# Altium PCB RX.PcbDoc (part 2 of 2)
Units mm, origin at the board's own origin, x right, y up, seen from the top; angles counter-clockwise.
Board outline 47 x 37 mm, 4 copper layers (Top Layer, Top Inner Layer, Bottom Inner Layer, Bottom Layer), stack 1.569 mm thick; 85 components, 65 nets, 311 pads, 196 vias.
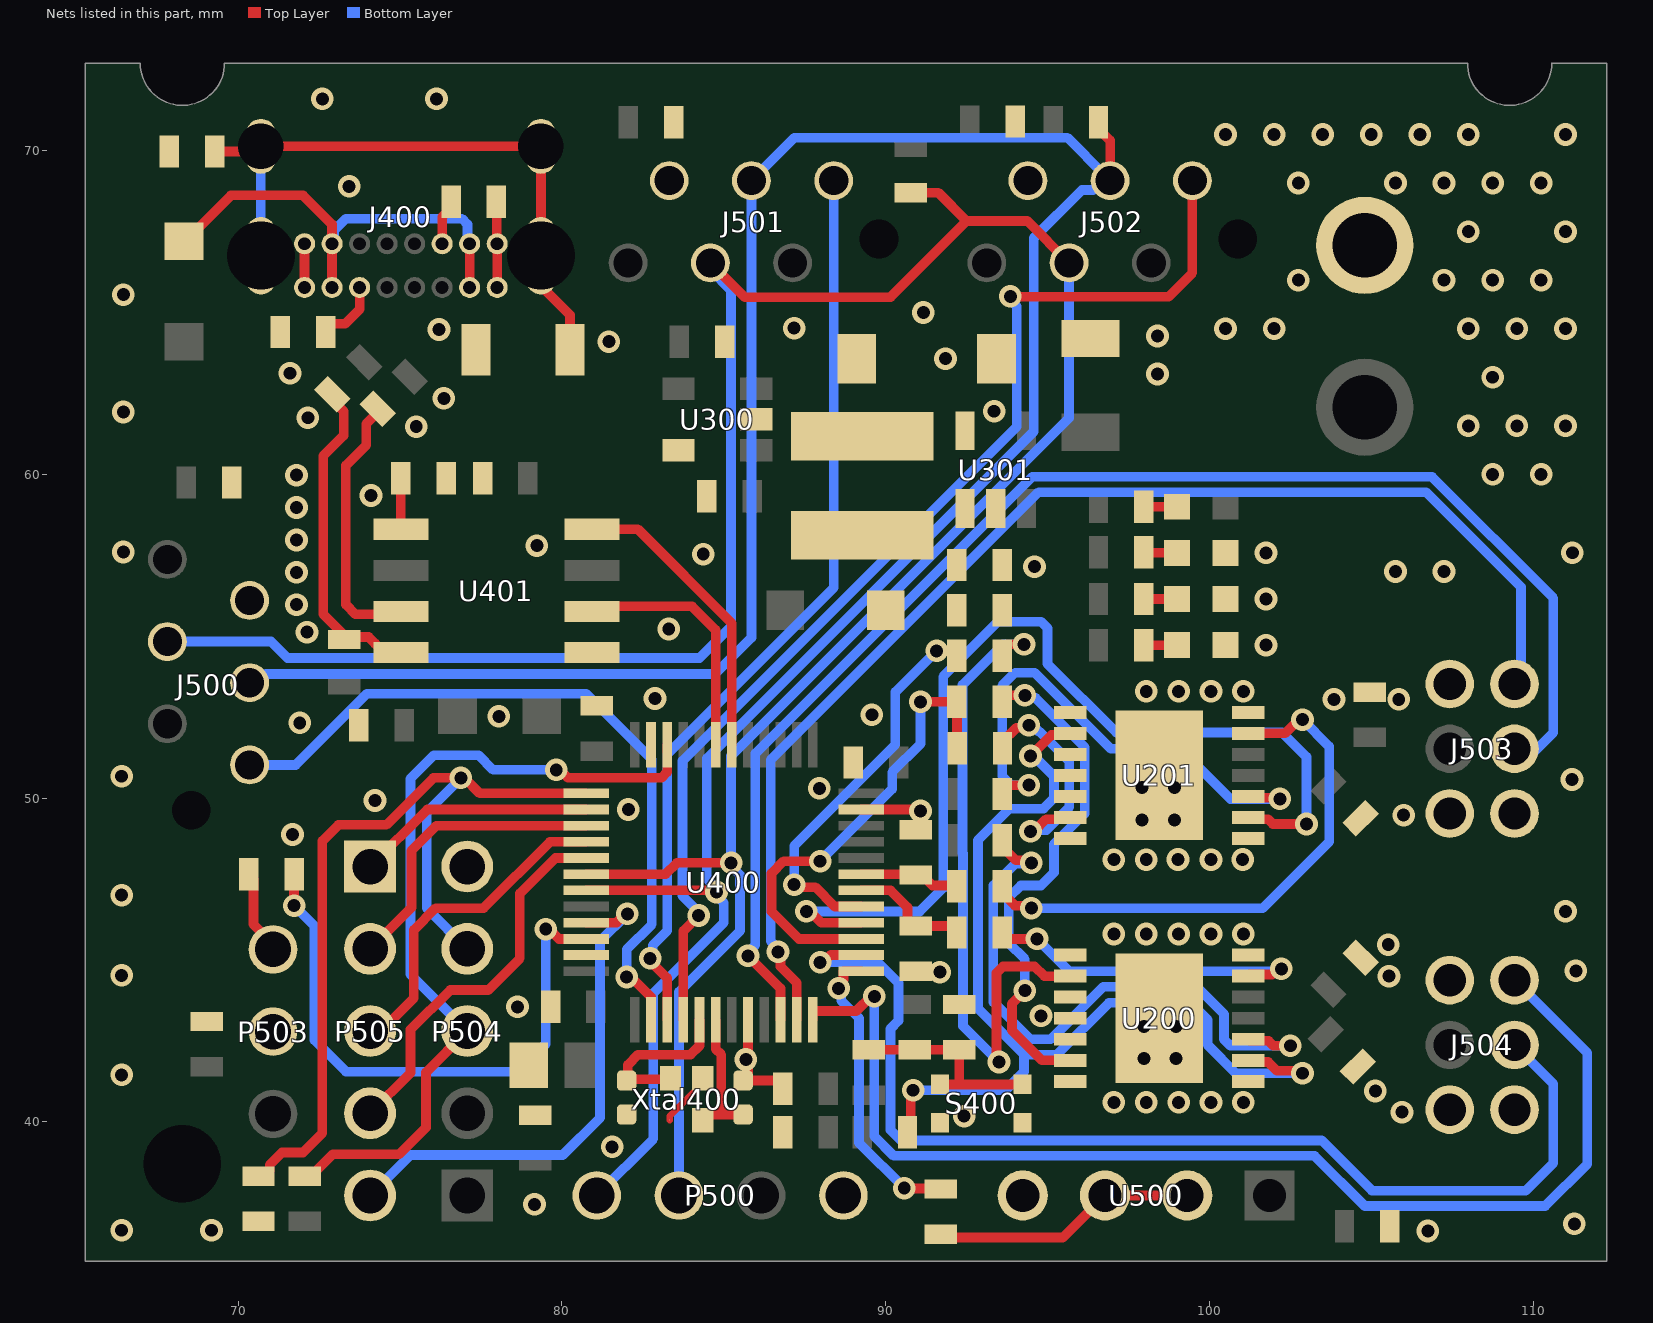
[diagram p4: the nets of this part, all layers, seen from the top]

## Via types
v1: diameter 0.7, hole 0.4, Top Layer to Bottom Layer, 196 vias

## Nets (pads, with @x,y where several pads share a name; then routed paths per layer and width w, separated by ;. In a path a pad name is that pad's centre, name@x,y a point inside that pad or via, vN(x,y) a via of type N, cw(c..) or ccw(c..) an arc to the next point about the centre after c; other vN are vias at no path point) (continued)
GND: C200.1 C201.1 C202.1 C203.1 C204.2 C205.2 C300.1 C301.1 C303.1 C304.1 C305.1 C400.1 C401.2 C402.2 C403.1 C404.2 C405.1 C406.1 C407.1 C408.2 C409.2 C410.1 C411.2 C500.2 C501.2 C502.2 C503.2 C504.2 C505.2 D302.2 D304.1 D305.1 D306.1 J300.2 J400.A1 J400.A12 J400.B1 J400.B12 J500.2 J501.2 J502.2 J503.1 J504.1 P500.1 P503.2 P504.5 R402.2 R403.1 R407.2 R501.1 R503.1 S400.1 S400.2 U200.3 U200.4 U200.5 U200.15 U201.3 U201.4 U201.5 U201.15 U300.2 U300.5 U301.2 U400.8 U400.23 U400.35 U400.47 U401.1 U500.4 Xtal400.2 Xtal400.4 | length 11.5
  Top Layer w0.2: Xtal400.2@83.325,40.05 83.325,40.175 84.125,40.975 84.125,41.125 Xtal400.4@84.35,41.35
  Top Layer w0.3: J400.A1@72.05,65.775 J400.B12@72.05,67.125 ; R403.1@77.975,68.425 77.988,68.413 77.988,67.138 J400.B1@78,67.125 J400.A12@78,65.775 ; U400.8@85.75,43.15 85.75,41.425 C406.1@85.6,41.275 86.675,41.275 86.825,41.125 C402.2@86.825,41.025 ; U400.23@89.25,49.65 91.025,49.65 v1(91.075,49.6) 91.075,49.175 C205.2@90.925,49.025
  other v1: 106.75,36.625 66.4,36.65 69.175,36.65 111.275,36.85 79.15,37.45 81.55,39.225 92.425,40.175 105.95,40.3 105.125,40.95 66.4,41.45 85.679,41.927 97.975,41.95 98.975,41.95 97.975,42.95 98.975,42.95 94.8,43.275 78.625,43.55 105.55,44.5 66.4,44.525 91.675,44.625 111.323,44.662 105.525,45.475 111,46.5 66.4,47 71.675,48.875 97.925,49.325 98.925,49.325 106,49.475 82.05,49.65 74.225,49.925 87.95,50.3 97.925,50.325 98.925,50.325 111.2,50.575 66.4,50.675 71.9,52.325 78.05,52.525 89.575,52.575 103.85,53.05 105.85,53.05 82.875,53.075 101.75,54.725 72.125,55.125 83.3,55.225 71.8,55.975 101.75,56.15 71.8,56.975 105.75,57 107.25,57 94.6,57.15 84.365,57.537 101.75,57.575 111.212,57.58 66.45,57.6 79.225,57.8 71.8,57.975 71.8,58.975 74.1,59.35 71.8,59.975 108.75,60 110.25,60 75.5,61.475 108,61.5 109.5,61.5 111,61.5 72.15,61.75 66.45,61.925 93.35,61.95 76.35,62.35 108.75,63 98.4,63.1 71.6,63.125 91.85,63.575 81.45,64.1 98.4,64.275 76.2,64.475 100.5,64.5 102,64.5 108,64.5 109.5,64.5 111,64.5 87.173,64.516 91.165,65 66.45,65.55 102.75,66 107.25,66 108.75,66 110.25,66 108,67.5 111,67.5 73.425,68.9 102.75,69 105.75,69 107.25,69 108.75,69 110.25,69 100.5,70.5 102,70.5 103.5,70.5 105,70.5 106.5,70.5 108,70.5 111,70.5 72.6,71.6 76.125,71.6
HE1_A: J504.5 U400.14 | length 34.5
  Top Layer w0.3: v1(87.975,44.925) 88.075,44.925 88.3,45.15 U400.14@89.25,45.15
  Bottom Layer w0.3: v1(87.975,44.925) 89.766,44.925 90.4,44.291 90.4,43.125 90.15,42.875 90.15,39.75 90.475,39.425 103.475,39.425 105.025,37.875 109.775,37.875 110.625,38.725 110.625,41.175 J504.5@109.425,42.375
HE1_B: J504.6 U400.12 | length 36.7
  Top Layer w0.3: U400.12@87.75,43.15 87.75,43.425 89.092,43.425 89.542,43.875 v1(89.65,43.875)
  Bottom Layer w0.3: v1(89.65,43.875) 89.65,39.55 90.25,38.95 103.25,38.95 104.8,37.4 110.375,37.4 111.675,38.7 111.675,42.125 J504.6@109.425,44.375
HE2_A: J503.6 U400.11 | length 39.7
  Top Layer w0.3: v1(86.675,45.25) 86.752,45.173 86.752,44.798 87.25,44.3 U400.11@87.25,43.15
  Bottom Layer w0.3: v1(86.675,45.25) 86.675,45.358 86.45,45.583 86.45,51.175 94.725,59.45 106.694,59.45 109.625,56.519 J503.6@109.625,53.025
HE2_B: J503.5 U400.10 | length 44
  Top Layer w0.3: v1(85.75,45.125) 86.75,44.125 U400.10@86.75,43.15
  Bottom Layer w0.3: v1(85.75,45.125) 85.75,45.233 85.975,45.458 85.975,51.375 94.525,59.925 106.877,59.925 110.625,56.177 110.625,52.025 J503.5@109.625,51.025
IS1: C204.1 R206.1 U400.18 | length 3.8
  Top Layer w0.3: U400.18@89.25,47.15 90.15,47.15 90.676,46.624 90.676,46.2 90.826,46.05 92.05,46.05 92.2,45.9 R206.1@92.2,45.85
IS2: C205.1 R207.1 U400.19 | length 3.1
  Top Layer w0.3: U400.19@89.25,47.65 90.9,47.65 C205.1@90.925,47.625 91.125,47.625 91.45,47.3 92.175,47.3 R207.1@92.2,47.275
M1_N: J504.4 U200.7 U200.8
  other v1: 97.05,40.6 98.05,40.6 99.05,40.6 100.05,40.6 101.05,40.6
M1_P: J504.3 U200.1 U200.14
  other v1: 97.05,45.8 98.05,45.8 99.05,45.8 100.05,45.8 101.05,45.8
M2_N: J503.4 U201.7 U201.8
  other v1: 97.05,48.1 98.05,48.1 99.03,48.102 100.05,48.1 101.03,48.102
M2_P: J503.3 U201.1 U201.14
  other v1: 98.05,53.3 99.05,53.3 100.05,53.3 101.05,53.3
MCU_RX: U400.31 U401.2 | length 7.7
  Top Layer w0.3: U401.2@80.925,55.765 81.085,55.925 84.025,55.925 84.75,55.2 U400.31@84.75,51.65
MCU_TX: U400.30 U401.4 | length 9.3
  Top Layer w0.3: U401.4@80.925,58.305 82.345,58.305 85.25,55.4 U400.30@85.25,51.65
NetC303_2: C303.2 C304.2 D300.2 L301.2 U301.1
NetC400_2: C400.2 R400.1 R401.1 S400.3 S400.4 | length 6.5
  Top Layer w0.3: R400.1@89.475,42.225 R401.1@90.9,42.225 92.061,42.225 C400.2@92.275,42.225 92.275,41.15 91.675,41.15 S400.4@91.675,41.165 ; 92.211,41.15 94.21,41.15 S400.3@94.225,41.165
NetC405_2: C405.2 U400.5 Xtal400.1 | length 5.1
  Top Layer w0.3: Xtal400.1@83.35,41.35 83.313,41.313 82.038,41.313 C405.2@82,41.275 82.034,41.309 82.034,41.759 82.35,42.075 83.975,42.075 84.25,42.35 U400.5@84.25,43.15
NetC406_2: C406.2 U400.6 Xtal400.3 | length 4.3
  Top Layer w0.3: Xtal400.3@84.35,40.05 84.525,40.225 84.925,40.225 ; U400.6@84.75,43.15 84.75,42.25 84.925,42.075 84.925,40.225 ; C406.2@85.6,40.225 84.925,40.225
NetC407_2: C407.2 J400.1 J400.2 J400.3 J400.4 R407.1 | length 20.2
  Top Layer w0.3: C407.2@69.275,69.975 70.423,69.975 J400.3@70.7,69.698 ; J400.3@70.7,70.135 J400.4@79.35,70.135 J400.2@79.35,66.755 79.465,66.64 79.465,65.71 80.25,64.925 R407.1@80.25,63.85
  Bottom Layer w0.3: J400.1@70.7,66.755 J400.3@70.7,70.135
NetC408_1: C408.1 U401.5 | length 1.6
  Top Layer w0.3: U401.5@75.025,58.305 C408.1@75.025,59.875
NetD302_1: D302.1 L301.1 U301.5
NetD303_2: D303.2 R303.2 | length 1
  Top Layer w0.3: R303.2@97.975,59 D303.2@99,59
NetD304_2: D304.2 R300.1 | length 1
  Top Layer w0.3: R300.1@97.975,57.6 98,57.575 D304.2@99,57.575
NetD305_2: D305.2 R301.2 | length 1
  Top Layer w0.3: R301.2@97.975,54.725 D305.2@99,54.725
NetD306_2: D306.2 R302.1 | length 1
  Top Layer w0.3: R302.1@97.975,56.15 D306.2@99,56.15
NetJ400_A5: J400.A5 R402.1 | length 2.1
  Top Layer w0.3: R402.1@72.7,64.4 72.7,64.5 72.85,64.65 73.3,64.65 73.75,65.1 J400.A5@73.75,65.775
NetJ400_B5: J400.B5 R403.2 | length 1.4
  Top Layer w0.3: J400.B5@76.3,67.125 76.3,67.95 76.575,68.225 R403.2@76.575,68.425
NetP503_3: P503.3 R504.1 | length 2.6
  Top Layer w0.3: R504.1@70.325,47.65 70.475,47.5 70.475,46.101 71.075,45.501 P503.3@71.075,45.325
NetR200_1: R200.1 U200.9 U201.2 | length 31.3
  Top Layer w0.3: R200.1@90.675,39.675 90.775,39.775 90.775,40.9 v1(90.85,40.975) ; v1(94.475,51.3) 95.125,51.95 95.575,51.95 U201.2@95.662,52.038 ; U200.9@101.2,41.9 101.25,41.85 101.817,41.85 102.09,41.577 102.798,41.577 v1(102.875,41.5)
  Bottom Layer w0.3: v1(90.85,40.975) 93.7,40.975 94.275,41.55 94.275,42.075 ; v1(94.475,51.3) 94.575,51.3 95.2,50.675 95.2,50 94.875,49.675 93.825,49.675 92.85,48.7 92.85,43.5 94.275,42.075 ; v1(102.875,41.5) 100.825,41.5 99.95,42.375 99.95,43.15 99.425,43.675 96.9,43.675 95.3,42.075 94.275,42.075
NetR201_2: R201.2 U200.2 | length 20.7
  Top Layer w0.3: v1(93.5,41.85) 93.424,41.926 93.424,44.599 93.625,44.8 94.6,44.8 94.9,44.5 U200.2@95.7,44.5 ; R201.2@93.6,54.4 93.6,54.6 93.75,54.75 v1(94.275,54.75)
  Bottom Layer w0.3: v1(93.5,41.85) 92.39,42.96 92.39,48.289 92.375,48.304 92.375,53.5 93.625,54.75 v1(94.275,54.75)
NetR202_2: R202.2 U200.10 | length 19.3
  Top Layer w0.3: R202.2@93.6,48.7 93.6,48.5 94.023,48.077 94.423,48.077 v1(94.5,48) ; U200.10@101.2,42.55 101.25,42.5 101.825,42.5 101.972,42.353 102.497,42.353 v1(102.5,42.35)
  Bottom Layer w0.3: v1(94.5,48) 94.472,47.972 93.997,47.972 93.325,47.3 93.325,43.7 94.475,42.55 95.1,42.55 96.725,44.175 99.6,44.175 100.45,43.325 100.45,42.55 100.65,42.35 v1(102.5,42.35)
NetR203_2: R203.2 U201.10 | length 16.1
  Top Layer w0.3: R203.2@93.6,50.125 93.6,50.25 93.75,50.4 v1(94.425,50.4) ; U201.10@101.2,50.05 101.238,50.013 102.137,50.013 v1(102.175,49.975)
  Bottom Layer w0.3: v1(94.425,50.4) 93.875,50.4 93.6,50.675 93.6,53.475 94,53.875 94.6,53.875 96.95,51.525 99.1,51.525 100.65,49.975 v1(102.175,49.975)
NetR204_2: R204.2 U200.6 | length 16
  Top Layer w0.3: R204.2@93.6,52.975 93.75,53.125 93.75,53.175 v1(94.3,53.175) ; v1(94.3,44.05) 93.9,43.65 93.9,42.826 94.826,41.9 U200.6@95.7,41.9
  Bottom Layer w0.3: v1(94.3,44.05) 94.3,45.025 93.8,45.525 93.8,46.925 94.175,47.3 94.8,47.3 95.2,47.7 95.2,48.575 96.15,49.525 96.15,51.575 94.627,53.098 94.377,53.098 v1(94.3,53.175)
NetR205_2: R205.2 U201.6 | length 7.3
  Top Layer w0.3: R205.2@93.608,51.544 93.608,51.744 94.038,52.173 94.348,52.173 v1(94.425,52.25) ; v1(94.475,48.975) 94.583,48.975 94.958,49.35 95.65,49.35 U201.6@95.7,49.4
  Bottom Layer w0.3: v1(94.425,52.25) 94.533,52.25 94.733,52.05 94.75,52.05 95.675,51.125 95.675,49.721 94.968,49.014 94.514,49.014 v1(94.475,48.975)
NetR206_2: R206.2 U200.13 | length 10.3
  Top Layer w0.3: R206.2@93.6,45.85 93.6,45.8 93.75,45.65 v1(94.675,45.65) ; U200.13@101.2,44.5 101.25,44.55 101.942,44.55 102.117,44.725 v1(102.225,44.725)
  Bottom Layer w0.3: v1(94.675,45.65) 95.675,44.65 102.15,44.65 v1(102.225,44.725)
NetR207_2: R207.2 U201.13 | length 17.3
  Top Layer w0.3: R207.2@93.488,47.187 93.998,46.677 94.423,46.677 v1(94.5,46.6) ; U201.13@101.2,52 102.342,52 102.767,52.425 v1(102.875,52.425)
  Bottom Layer w0.3: v1(94.5,46.6) 101.65,46.6 103.7,48.65 103.7,51.6 v1(102.875,52.425)
NetR500_2: R500.2 U500.2 U500.3 | length 8.2
  Top Layer w0.3: R500.2@91.7,36.525 91.8,36.425 95.475,36.425 U500.3@96.775,37.725 U500.2@99.315,37.725
PA15: P505.1 U400.38 | length 7.4
  Top Layer w0.3: P505.1@74.075,47.885 75.84,49.65 U400.38@80.75,49.65
PB3: P505.2 U400.39 | length 9.3
  Top Layer w0.3: P505.2@74.075,45.345 75.35,46.62 75.35,48.377 76.123,49.15 U400.39@80.75,49.15
PB4: P505.3 U400.40 | length 10.3
  Top Layer w0.3: P505.3@74.075,42.805 74.405,42.805 75.425,43.825 75.425,45.925 76.1,46.6 77.575,46.6 79.625,48.65 U400.40@80.75,48.65
PB5: P505.4 U400.41 | length 11.9
  Top Layer w0.3: P505.4@74.075,40.265 75.325,41.515 75.325,42.85 76.55,44.075 77.725,44.075 78.7,45.05 78.7,47.05 79.8,48.15 U400.41@80.75,48.15
PB8: P505.5 U400.45 | length 16.1
  Top Layer w0.3: U400.45@80.75,46.15 81.692,46.15 81.967,46.425 v1(82.021,46.425)
  Bottom Layer w0.3: P505.5@74.075,37.725 75.325,38.975 80.025,38.975 81.175,40.125 81.175,45.579 v1(82.021,46.425)
RF_DATA: R500.1 U400.13 | length 9.3
  Top Layer w0.3: v1(88.55,44.125) 88.55,44.233 88.7,44.383 88.7,44.65 U400.13@89.25,44.65 ; v1(90.575,37.95) 90.587,37.938 91.688,37.938 R500.1@91.7,37.925
  Bottom Layer w0.3: v1(88.55,44.125) 88.627,44.048 88.627,43.748 89.175,43.2 89.175,39.35 v1(90.575,37.95)
SCK: R204.1 R205.1 U400.15 | length 14.7
  Top Layer w0.3: v1(87.975,48.05) 86.85,48.05 86.475,47.675 86.475,46.5 87.325,45.65 U400.15@89.25,45.65 ; v1(91.075,52.975) R204.1@92.2,52.975 92.204,52.971 92.204,51.548 R205.1@92.208,51.544
  Bottom Layer w0.3: v1@87.978,48.053 90.2,50.275 90.2,50.8 91.075,51.675 v1(91.075,52.975)
SCL: J500.3 J501.3 J502.3 P500.3 R410.1 U400.42 | length 83.3
  Top Layer w0.3: U400.42@80.75,47.65 83.2,47.65 83.55,48 v1(85.225,48) ; J501.3@84.585,66.535 85.645,65.475 90.15,65.475 92.5,67.825 ; R410.1@90.775,68.7 91.625,68.7 92.5,67.825 ; J502.3@95.665,66.535 94.375,67.825 92.5,67.825
  Bottom Layer w0.3: J500.3@67.81,54.835 71.015,54.835 71.525,54.325 84.25,54.325 85.223,55.298 85.223,65.688 84.585,66.325 J501.3@84.585,66.535 ; P500.3@83.615,37.725 83.615,44.015 85.5,45.9 85.5,47.624 85.225,47.899 85.225,51.3 95.665,61.74 J502.3@95.665,66.535
SDA: J500.4 J501.4 J502.4 P500.4 R409.1 U400.43 | length 86.7
  Top Layer w0.3: U400.43@80.75,47.15 84.725,47.15 v1(84.775,47.1) ; R409.1@96.575,70.875 96.575,70.675 96.935,70.315 J502.4@96.935,69.075
  Bottom Layer w0.3: J500.4@70.35,53.565 70.594,53.565 70.86,53.831 84.731,53.831 85.855,54.955 J501.4@85.855,69.075 87.18,70.4 95.61,70.4 96.78,69.23 96.78,69.164 96.404,68.788 96.063,68.788 94.575,67.3 94.575,61.325 84.475,51.225 84.475,47.508 v1@84.775,47.208 ; P500.4@81.075,37.725 82.825,39.475 82.825,43.975 85,46.15 85,46.767 84.775,46.992 v1(84.775,47.1)
SDI: R201.1 U400.17 | length 12.1
  Top Layer w0.3: v1(87.175,47.325) 87.252,47.248 87.827,47.248 88.425,46.65 U400.17@89.25,46.65 ; v1(91.575,54.55) 92.05,54.55 R201.1@92.2,54.4
  Bottom Layer w0.3: v1(87.175,47.325) 87.175,48.525 90.3,51.65 90.3,53.275 v1(91.575,54.55)
SDO: U201.9 U400.16 | length 31.2
  Top Layer w0.3: v1(87.55,46.5) 87.658,46.5 88.008,46.15 U400.16@89.25,46.15 ; U201.9@101.2,49.4 101.25,49.35 101.81,49.35 101.96,49.2 v1(103,49.2)
  Bottom Layer w0.3: v1(87.55,46.5) 91.05,46.5 91.775,47.225 91.775,53.75 93.475,55.45 94.8,55.45 95,55.25 95,54.15 97.125,52.025 102.25,52.025 103,51.275 v1(103,49.2)
SERVO: R504.2 U400.46 | length 18.2
  Top Layer w0.3: v1@71.725,46.65 R504.2@71.725,47.65 ; v1(79.5,45.95) 79.608,45.95 79.908,45.65 U400.46@80.75,45.65
  Bottom Layer w0.3: v1(71.729,46.677) 72.35,46.056 72.35,42.525 73.325,41.55 78.65,41.55 79.5,42.4 v1(79.5,45.95)
SWCLK: P504.4 R503.2 U400.37 | length 27.1
  Top Layer w0.3: R503.2@70.625,38.325 70.825,38.325 70.975,38.475 70.975,38.675 71.35,39.05 72,39.05 72.6,39.65 72.6,48.675 73.1,49.175 74.575,49.175 76.025,50.625 v1(76.875,50.625) 76.983,50.625 77.458,50.15 U400.37@80.75,50.15
  Bottom Layer w0.3: v1(76.875,50.625) 75.825,49.575 75.825,46.595 P504.4@77.075,45.345
SWDIO: P504.3 R502.2 U400.34 | length 25.8
  Top Layer w0.3: R502.2@72.05,38.325 72.25,38.325 72.925,39 74.975,39 75.8,39.825 75.8,41.53 P504.3@77.075,42.805 ; v1(79.825,50.875) 79.933,50.875 80.183,50.625 83.074,50.625 83.25,50.801 U400.34@83.25,51.65
  Bottom Layer w0.3: P504.3@77.075,42.805 75.325,44.555 75.325,50.6 76.05,51.325 77.425,51.325 77.875,50.875 v1(79.825,50.875)
TOF_1: J500.6 U400.2 | length 22.9
  Top Layer w0.3: v1(82,44.475) 82.077,44.398 82.205,44.398 82.75,43.854 U400.2@82.75,43.15
  Bottom Layer w0.3: J500.6@70.35,51.025 71.775,51.025 73.975,53.225 80.75,53.225 82.775,51.2 82.775,46.1 82,45.325 v1(82,44.475)
TOF_2: J501.6 U400.3 | length 28.5
  Top Layer w0.3: v1(82.725,45.05) 82.725,44.969 83.25,44.444 U400.3@83.25,43.15
  Bottom Layer w0.3: v1(82.725,45.05) 82.802,45.127 82.802,45.452 83.25,45.9 83.25,51.35 88.395,56.495 J501.6@88.395,69.075
TOF_3: J502.6 U400.4 | length 35.9
  Top Layer w0.3: U400.4@83.75,43.15 83.75,45.9 v1(84.225,46.375) ; v1(93.85,65.5) 93.865,65.485 98.735,65.485 99.475,66.225 J502.6@99.475,69.075
  Bottom Layer w0.3: v1(84.225,46.375) 84.225,46.483 83.725,46.983 83.725,51.15 94.05,61.475 94.05,65.192 93.85,65.392 v1(93.85,65.5)
USB_D_N: R406.2 U401.7 | length 8.3
  Top Layer w0.3: R406.2@74.305,62.03 74.305,61.917 73.956,61.567 73.956,60.909 73.325,60.278 73.325,55.975 73.625,55.675 74.935,55.675 U401.7@75.025,55.765
USB_D_P: R404.1 R405.2 U401.8 | length 10.1
  Top Layer w0.3: R405.2@72.905,62.48 72.905,62.301 73.256,61.951 73.256,61.199 72.625,60.568 72.625,55.685 73.13,55.18 73.335,54.975 74.03,54.975 74.225,54.78 74.225,54.77 74.5,54.495 U401.8@75.025,54.495
VBUS: D400.2 J400.A4 J400.A9 J400.B4 J400.B9 | length 14.2
  Top Layer w0.3: D400.2@68.325,67.2 68.36,67.2 69.78,68.62 72.005,68.62 72.9,67.725 J400.B9@72.9,67.125 J400.A4@72.9,65.775 ; J400.A9@77.15,65.775 J400.B4@77.15,67.125
  Bottom Layer w0.3: J400.B9@72.9,67.125 72.967,67.192 72.967,67.542 73.325,67.9 76.907,67.9 77.083,67.724 77.083,67.192 J400.B4@77.15,67.125
pads on no net: J400.A8 J400.B8 J500.0 J500.5 J501.0 J501.5 J502.0 J502.5 U400.20 U400.22 U400.26 U400.27 U400.28 U400.29 U400.32 U400.33

## Polygon pours and split planes (outlines as drawn)
GND on Top Layer "GND_L01_P071" (solid, remove dead copper, pour order 71): 63.825,76.85 115.225,76.85 115.225,35.175 63.825,35.175
GND on Top Layer "Main" (solid, remove dead copper, pour order 42): 85.425,58.538 85.425,61.275 86.55,61.275 86.55,62.175 85.675,62.175 85.675,65.1 82.75,65.1 82.75,58.538
GND on Top Layer "Main" (solid, remove dead copper, pour order 77): 83.975,54.396 85.5,54.396 85.5,58.975 84.45,58.975 84.45,57.175 83.975,56.7
+3V3 on Top Layer "Main" (solid, remove dead copper, pour order 61): 76.175,56.95 80.25,56.95 81.8,58.5 84.325,58.5 84.325,57.275 83.825,56.775 83.825,54.65 83.175,54.65 82.425,55.4 76.175,55.4
+5V on Top Layer "Main" (solid, remove dead copper, pour order 38): 86.975,57.075 88.1,57.075 88.1,55.1 87.6,55.1 86.225,55.1 86.225,56.45 85.5,57.175 85.5,61.175 86.55,61.175 86.55,57.5
NetC303_2 on Top Layer "Main" (solid, remove dead copper, pour order 39): 88.237,57.375 89.425,56.187 89.425,55.175 92.375,55.175 92.75,55.55 92.75,59.55 91.8,59.55 91.125,58.875 87.075,58.875 87.075,57.375
+12V on Top Layer "Main" (solid, remove dead copper, pour order 54): 105.2,43.8 106.375,43.8 106.725,43.45 107.9,43.45 108.375,42.975 108.375,41.825 107.975,41.425 105.85,41.425 104.725,42.55 104.25,42.075 103.275,42.075 102.4,42.95 100.575,42.95 100.575,44.1 102.325,44.1 103.353,45.128 103.872,45.128
GND on Top Layer "Main" (solid, remove dead copper, pour order 62): 94.725,42.325 94.125,42.925 94.125,43.75 94.475,44.1 96.4,44.1 96.4,44.675 96.95,45.225 99.8,45.225 99.8,41.125 97.025,41.125 97.025,41.675 96.375,42.325
GND on Top Layer "Main" (solid, remove dead copper, pour order 83): 81.5,45.406 79.057,45.406 79.057,45.006 78.025,43.974 78.025,39.82 78.545,39.3 80.15,39.3 80.15,44.8 81.5,44.8
GND on Top Layer "Main" (solid, remove dead copper, pour order 78): 92.954,60.425 92.954,55.471 93.3,55.125 93.991,55.125 94.166,55.3 94.154,55.312 94.154,58.021 93.846,58.329 93.846,60.425
GND on Top Layer "Main" (solid, remove dead copper, pour order 76): 90.4,44.325 91.325,44.325 91.725,43.925 91.725,43.275 92.875,43.275 92.875,44.4 92.25,45.025 90.4,45.025
GND on Top Layer "Main" (solid, remove dead copper, pour order 75): 95.175,51.625 95.175,49.8 96.45,49.8 97.025,49.225 97.025,48.675 99.875,48.675 99.875,52.75 96.959,52.75 96.475,52.266 96.475,51.625
NetD302_1 on Top Layer "Main" (solid, remove dead copper, pour order 40): 91.15,61.95 89.725,63.375 89.725,64.35 88.5,64.35 88.5,63.35 87.075,61.925 87.075,60.425 92.75,60.425 92.75,61.95
+12V on Top Layer "Main" (solid, remove dead copper, pour order 41): 94.85,58.975 95.65,59.775 105.725,59.775 106.675,60.725 106.675,63.754 103.329,63.754 101.975,62.4 94.05,62.4 94.05,58.35 94.85,58.35
GND on Top Layer "Main" (solid, remove dead copper, pour order 52): 104,49.675 104.8,50.475 107.9,50.475 108.35,50.025 108.35,49 108.1,48.75 104,48.75
+12V on Top Layer "Main" (solid, remove dead copper, pour order 53): 102.6,51.6 103.5,52.5 104.375,52.5 108.125,52.5 108.4,52.225 108.4,50.9 108.175,50.675 104.725,50.675 103.775,49.725 103.4,49.725 102.625,50.5 100.575,50.5 100.575,51.6
+3V3 on Top Layer "Main" (solid, remove dead copper, pour order 60): 87.825,41.625 90.025,41.625 90.025,39.175 87.825,39.175
GND on Top Layer "Main" (solid, remove dead copper, pour order 64): 103.762,41.363 105.675,39.45 108,39.45 108.275,39.725 108.275,41 108.05,41.225 105.875,41.225 104.75,42.35
GND on Top Layer "Main" (solid, remove dead copper, pour order 65): 103.95,45.2 105.225,43.925 106.325,43.925 106.325,45.325 105.75,45.9 104.65,45.9
GND on Top Layer "Main" (solid, remove dead copper, pour order 66): 102.95,52.6 106.475,52.6 106.475,53.15 106,53.625 103.4,53.625 102.95,53.175
M2_P on Top Layer "Main" (solid, remove dead copper, pour order 67): 106.05,53.625 107,52.675 108.05,52.675 108.4,53.025 108.4,54.1 107.225,55.275 102.7,55.275 101.45,54.025 96.2,54.025 95,52.825 95,52.45 96.25,52.45 96.7,52.9 99.85,52.9 100.35,52.4 102.175,52.4 103.4,53.625
M2_N on Top Layer "Main" (solid, remove dead copper, pour order 68): 104.35,47.2 109.8,47.2 110.65,48.05 110.65,50.025 110.2,50.475 108.95,50.475 108.475,50 108.475,48.85 108.15,48.525 102.325,48.525 102.175,48.675 101.9,48.95 100.425,48.95 99.975,48.5 96.925,48.5 96.475,48.95 95,48.95 95,48.3 96.1,47.2
M1_P on Top Layer "Main" (solid, remove dead copper, pour order 69): 103.775,45.325 104.475,46.025 105.925,46.025 106.55,45.4 106.55,43.95 106.925,43.575 108.075,43.575 108.4,43.9 108.4,46 107.425,46.975 96.625,46.975 95.1,45.45 95.1,44.937 96.237,44.937 96.687,45.387 100.013,45.387 100.513,44.887 101.737,44.887 102.175,45.325
M1_N on Top Layer "Main" (solid, remove dead copper, pour order 70): 109.25,37.575 110.425,38.75 110.425,40.875 110.05,41.25 108.85,41.25 108.475,40.875 108.475,39.675 108.05,39.25 105.525,39.25 103.65,41.125 102.025,41.125 101.7,41.45 100.575,41.45 100.125,41 96.974,41 96.524,41.45 95.1,41.45 95.1,40.45 95.95,39.6 102.825,39.6 104.85,37.575
GND on Bottom Inner Layer "Main" (solid, remove dead copper, pour order 81): 86.675,61.8 113.4,61.8 113.4,34.925 86.675,34.925
GND on Bottom Inner Layer "NONET_L01_P-001" (solid, remove dead copper, pour order 80): 97.5,55.275 98.675,54.1 104.7,54.1 113.095,62.495 113.075,65.05 113.075,74.05 97.5,74.05
+3V3 on Bottom Inner Layer "+3V3_L03_P079" (solid, remove dead copper, pour order 79): 63.575,76.85 116.85,76.85 116.85,35.175 63.575,35.175
+12V on Bottom Inner Layer "Main" (solid, remove dead copper, pour order 63): 94.95,54.475 96.825,56.35 96.825,61.775 97.475,62.4 101.975,62.4 103.125,63.55 106.675,63.55 106.675,60.725 105.725,59.775 101.6,59.775 100.7,58.875 100.7,56 98.4,53.7 98.775,53.325 107.525,53.325 108.425,52.425 108.425,50.425 103.3,50.425 97.366,50.425 96.7,49.759 96.7,45.4 104.025,45.4 106.025,43.4 108.025,43.4 108.425,43 108.425,41.45 108.15,41.175 105.025,41.175 103.525,42.675 100.35,42.675 99.425,43.6 96.2,43.6 94.95,44.85
M2_P on Bottom Inner Layer "Main" (solid, remove dead copper, pour order 43): 98.15,54.025 97.7,53.575 97.7,52.9 99.85,52.9 100.35,52.4 102.175,52.4 103.4,53.625 106.05,53.625 107,52.675 108.05,52.675 108.4,53.025 108.4,54.1 107.225,55.275 102.7,55.275 101.45,54.025
M2_N on Bottom Inner Layer "Main" (solid, remove dead copper, pour order 44): 108.15,48.525 108.475,48.85 108.475,50 108.95,50.475 110.2,50.475 110.45,50.225 110.45,48.1 109.55,47.2 104.35,47.2 96.7,47.2 96.7,48.525
M1_P on Bottom Inner Layer "Main" (solid, remove dead copper, pour order 45): 104.125,45.4 104.75,46.025 105.925,46.025 106.55,45.4 106.55,43.95 106.925,43.575 108.075,43.575 108.4,43.9 108.4,46 107.625,46.775 96.7,46.775 96.7,45.4
M1_N on Bottom Inner Layer "Main" (solid, remove dead copper, pour order 46): 109.25,37.575 110.425,38.75 110.425,40.875 110.05,41.25 108.85,41.25 108.475,40.875 108.475,39.675 108.05,39.25 105.525,39.25 103.725,41.05 96.7,41.05 96.7,39.6 102.55,39.6 104.575,37.575
GND on Bottom Layer "GND_L04_P082" (solid, remove dead copper, pour order 82): 63.575,76.85 113.725,76.85 113.725,35.175 63.575,35.175
+12V on Bottom Layer "Main" (solid, remove dead copper, pour order 74): 96.025,62.4 101.975,62.4 103.125,63.55 106.675,63.55 106.675,60.725 106.275,60.325 96.025,60.325
+12V on Bottom Layer "Main" (solid, remove dead copper, pour order 58): 104.25,50.6 107.85,50.6 108.35,51.1 108.35,52.15 108,52.5 104.75,52.5 104.05,51.8 104.05,50.8
+12V on Bottom Layer "Main" (solid, remove dead copper, pour order 73): 107.875,41.45 108.425,42 108.425,43 108.025,43.4 105.875,43.4 105.35,43.925 104.3,43.925 103.925,43.55 103.925,42.525 104.663,41.787 106.438,41.787 106.775,41.45
GND on Top Inner Layer "GND_L02_P055" (solid, remove dead copper, pour order 55): 61.875,76.85 116,76.85 116,35.175 61.875,35.175

## Other copper
Top Layer:
  pour cut-out: 88.1,54.896 89.346,54.896 89.44,54.99 88.194,54.99
  pour cut-out: 70.825,48.35 71.225,48.35 71.225,47.75 70.825,47.75
  pour cut-out: 74.23,58.83 73.755,58.83 73.625,58.7 73.625,57.625 73.69,57.56 76.885,57.56 78.425,59.1 78.275,59.25 74.65,59.25
  pour cut-out: 85.917,47.967 85.565,48.32 86.734,49.488 87.086,49.136
  pour cut-out: 81.704,45.3 81.704,45.029 81.575,44.9 81.3,44.9 81.3,45.18 81.42,45.3
  pour cut-out: 75.436,62.171 75.154,61.889 74.229,62.814 74.511,63.096
  pour cut-out: 72.384,63.709 72.666,63.991 73.971,62.686 73.689,62.404
  pour cut-out: 87.525,60.25 86.754,60.25 86.754,59.325 87.525,59.325
  pour cut-out: 71.35,37.825 71.725,37.825 71.725,35.85 71.35,35.85
  pour cut-out: 94.825,54.641 95.275,55.091 95.275,55.475 94.725,55.475 94.5,55.25 94.5,54.966
  pour cut-out: 92.95,60.413 92.521,60.413 92.521,59.55 92.95,59.55
  pour cut-out: 92.7,45.15 93.1,45.15 93.1,45.45 92.7,45.45
  pour cut-out: 96,35.925 101.35,35.925 101.35,39.4 96,39.4
  pour cut-out: 99.6,59.721 99.35,59.721 99.35,54.2 99.6,54.2
Bottom Inner Layer:
  pour cut-out: 87.075,35.925 87.075,38.125 90.6,41.65 92.2,41.65 92.2,41.2 90.9,41.2 87.625,37.925 87.625,35.925
  pour cut-out: 100.907,58.878 101.6,59.571 101.954,59.571 102.15,59.375 102.15,58.368 100.907,58.368
  pour cut-out: 95.629,58.404 95.629,72.7 96.575,72.7 96.747,58.6
Bottom Layer:
  pour cut-out: 89.14,69.384 89.25,69.493 89.25,70.1 88.625,70.1 88.55,70.025 88.55,69.75 88.916,69.384
  pour cut-out: 86.5,65.075 87.575,65.075 87.7,64.95 87.7,64.265 87.485,64.049 86.751,64.049 86.5,64.3
  pour cut-out: 91.15,45.1 91.85,45.1 92.025,44.925 92.025,44.35 91.825,44.15 91.325,44.15 91.15,44.325
  pour cut-out: 92,40.7 92.925,40.7 92.925,39.7 92,39.7
  pour cut-out: 81.6,37.075 83.175,37.075 83.175,37.85 81.6,37.85
  pour cut-out: 71.96,46.692 73.15,47.881 73.15,48.35 72.325,48.35 71.658,47.683 71.658,46.994
  pour cut-out: 73.275,39.651 73.275,38.275 73.325,38.225 73.6,38.5 73.6,39.575 73.525,39.65
  pour cut-out: 81.275,39.75 82.5,39.75 82.575,39.825 82.575,40.175 81.525,40.175 81.275,39.925 81.275,39.775
  pour cut-out: 101.516,53.612 101.843,53.612 102.563,52.891 102.563,52.534 101.816,52.534 101.516,52.834
  pour cut-out: 96.507,49.55 96.507,48.652 100.4,48.652 100.4,49.775 100.775,49.775 101.15,49.4 101.15,48.425 96.1,48.425 96.1,49.55
  pour cut-out: 102.775,42.775 102.775,47.175 102.55,47.175 102.55,42.775
  pour cut-out: 103.341,41.3 103.625,41.016 103.625,39.755 103.341,39.755
  pour cut-out: 96.95,43.318 96.95,41.05 96.825,41.05 96.825,43.318

## Silkscreen, mask and mechanical layers (free items; w line width, h text height)
Top Overlay:
  circle w0.3: c87.35,62.45 r0.1
  lines w0.15: 101.75,59.375 102.084,59.375 102.15,59.309 102.366,59.093 ; 101.9,57.925 102.5,57.925 103.85,57.925 104.3,58.375 104.95,58.375 ; 102,55.05 102.65,55.05 103.45,55.85 104.25,55.85 104.625,56.225 105.1,56.225 ; 102.175,56.325 102.45,56.325 102.625,56.5
  text "Bat-" at 108.975,66.337 h0.6 r45
  text "Bat+" at 108.975,61.962 h0.6 r45
  text "D" at 102.775,58.425 h0.6
  text "12V" at 105.7,58.125 h0.6
  text "3V3" at 102.775,56.825 h0.6
  text "5V" at 105.7,56 h0.6
Bottom Overlay:
  drawing of 57 lines, arcs and shapes, not listed
  text ".GlobalProjectTitle" at 83.5,62.375 h1
  text ".GlobalRevisionEngineer" at 95.175,62.375 h1
  text ".GlobalProjectRevision" at 76.3,61.65 h1
  text ".GlobalProjectTitleAbr" at 83.475,60.392 h1
  text ".GlobalRevisionDate" at 95.175,60.225 h1
  text "A15" at 74.6,56.325 h0.6
  text "PB3" at 74.6,54.875 h0.6
  text "PB4" at 74.608,53.108 h0.6
  text "PB5" at 74.6,51.325 h0.6
  text "PB8" at 74.6,50.225 h0.6
  text "G" at 79.975,48.325 h0.6
  text "SERVO" at 69.1,47.55 h0.6
  text "SWCLK" at 81.475,44.725 h0.6
  text "G" at 68.35,44.425 h0.6
  text "SWDIO" at 82.1,43.3 h0.6
  text "5V" at 68.625,42.55 h0.6
  text "BOOT" at 80.309,41.15 h0.6
  text "SDA" at 81.85,40.937 h0.6 r315
  text "G" at 93.55,39.912 h0.6 r315
  text "RF" at 95.7,39.912 h0.6 r315
  text "5V" at 102.675,39.612 h0.6 r315
  text "SCL" at 83.6,39.162 h0.6 r315
  text "3V3" at 86.175,39.162 h0.6 r315
  text "G" at 88.7,39.162 h0.6 r315
  text "3V3" at 79.85,38.975 h0.6
Mechanical 1:
  the board outline again, w0.254

## Dimensions
112.275,72.7 to 112.275,35.7 on Mechanical 1
65.275,72.7 to 112.275,72.7 on Mechanical 1